# Altium PCB CarteTxCapteurDistance.PCBDOC
Units mm, origin at the board's own origin, x right, y up, seen from the top; angles counter-clockwise.
Board outline 299.72 x 199.9 mm, 2 copper layers (Top Layer, Bottom Layer); 45 components, 33 nets, 132 pads, 69 vias.
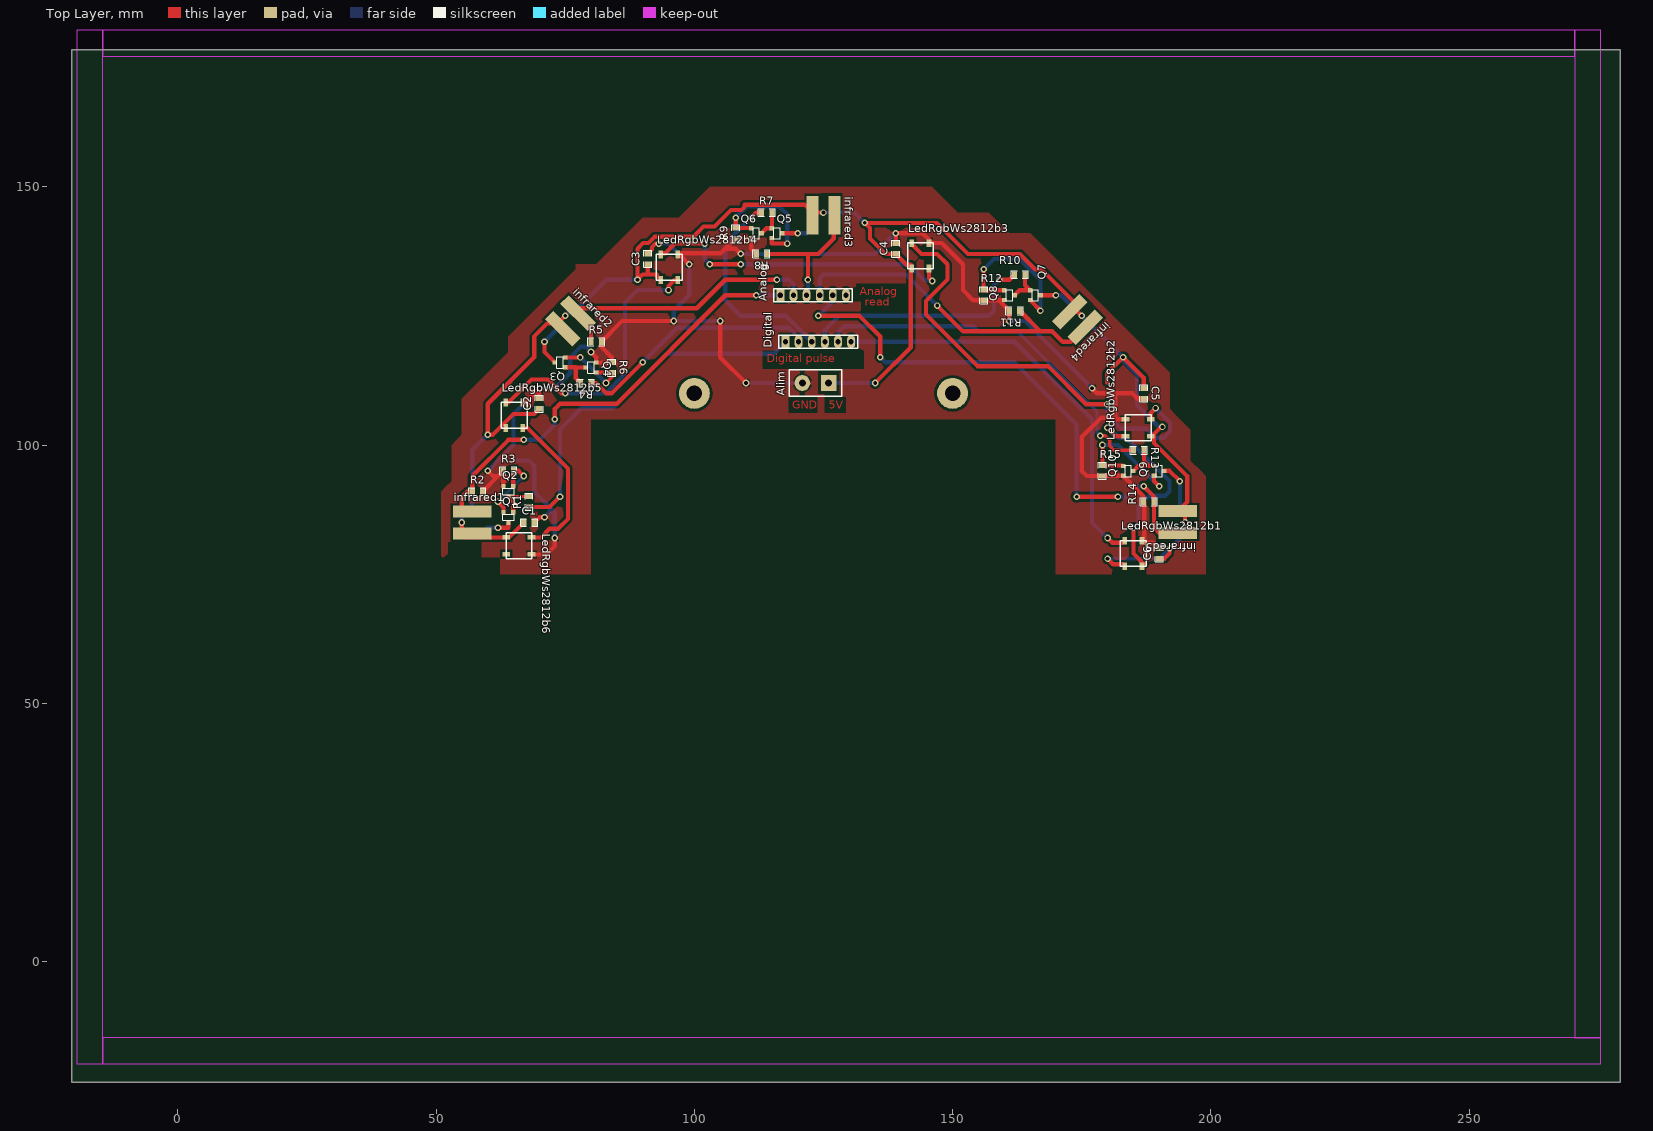
[diagram p0: Top Layer view]
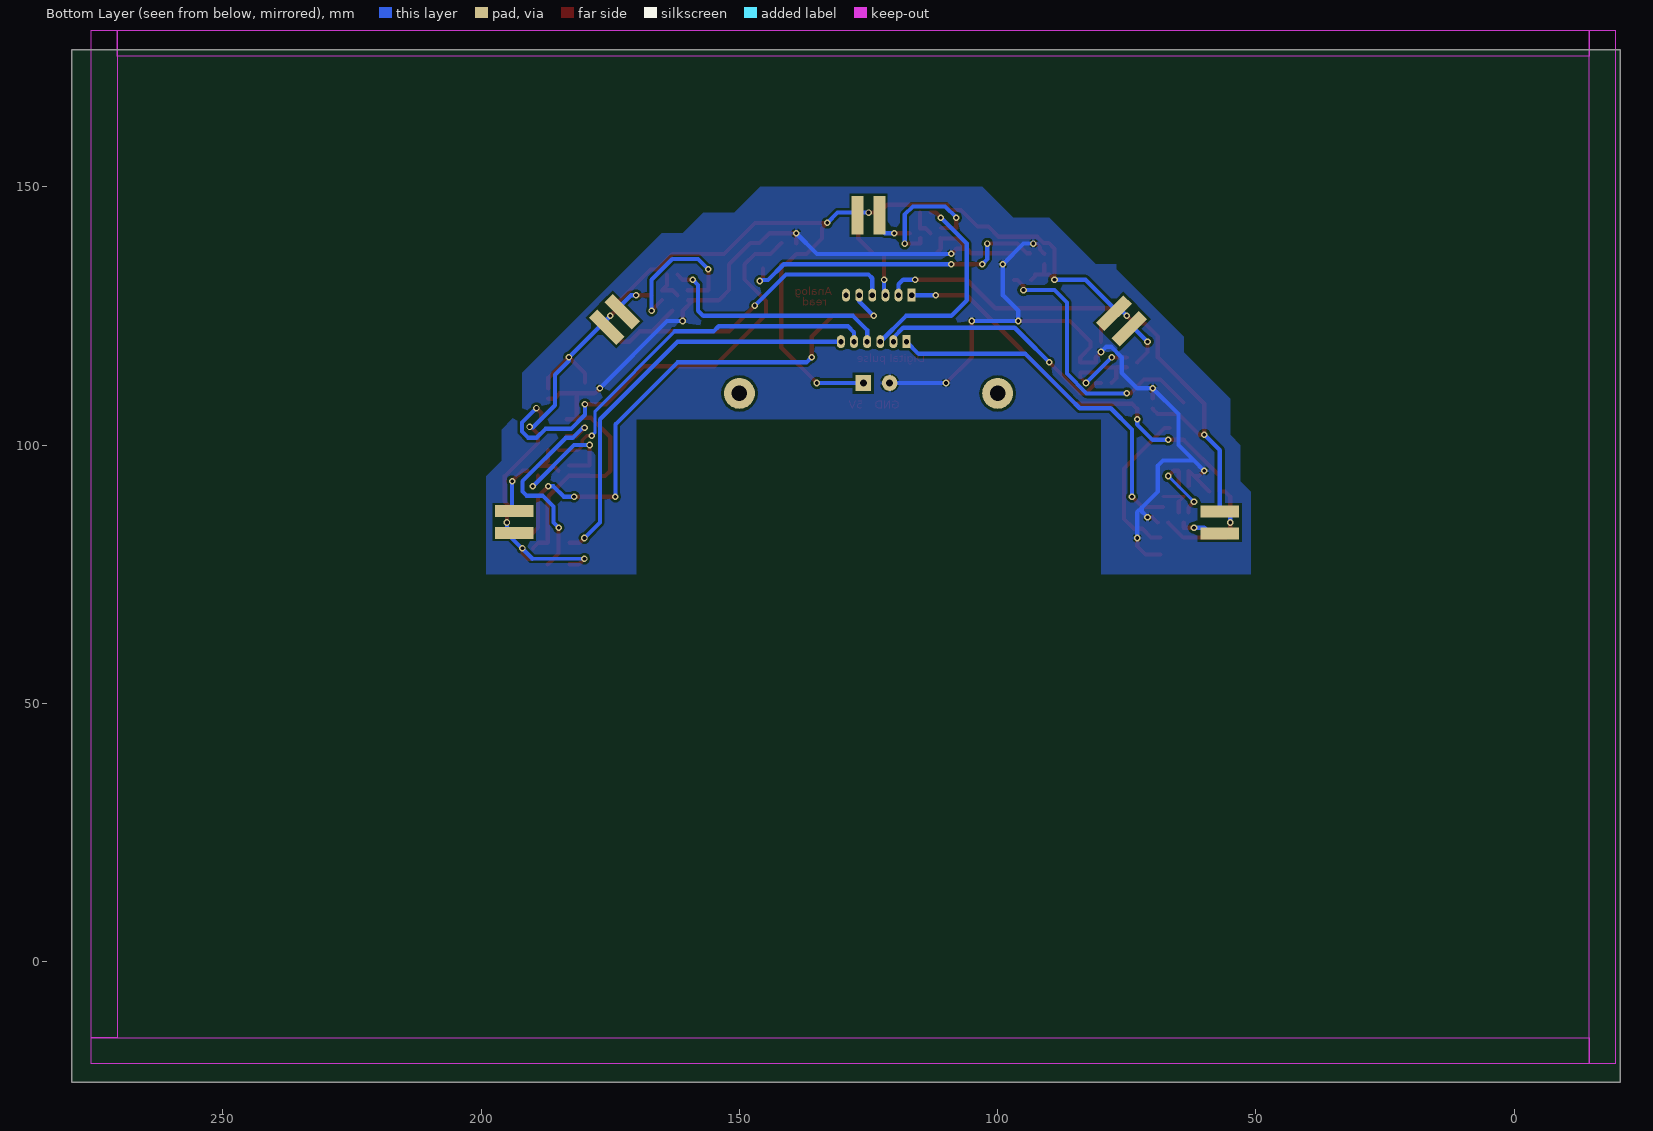
[diagram p1: Bottom Layer view, seen from below]

## Layer stack, top to bottom
Top Solder: solder mask 0.0102, Solder Resist, Dk 3.5
Top Layer: signal copper 0.0356
Dielectric1: dielectric 0.32, FR-4, Dk 4.8
Bottom Layer: signal copper 0.0356
Bottom Solder: solder mask 0.0102, Solder Resist, Dk 3.5

## Board outline
-20.497,-23.403 279.223,-23.403 279.223,176.495 -20.497,176.495

## Design rules (kind name [scope] priority, off if disabled: settings)
Clearance Clearance_bottom_polygon [OnLayer('Bottom Layer') Or OnLayer('Multi-Layer') vs OnLayer('Bottom Layer')  And  InPoly] p1: gap=0.508
Clearance Clearance_top_polygon [OnLayer('Top Layer')  Or OnLayer('Multi-Layer') vs OnLayer('Top Layer') And InPoly] p2: gap=0.508
Clearance Clearance_bottom [OnLayer('Bottom Layer') Or OnLayer('Multi-Layer') vs OnLayer('Bottom Layer')  And Not InPoly] p3: gap=0.203
Clearance Clearance_top [OnLayer('Top Layer')  Or OnLayer('Multi-Layer') vs OnLayer('Top Layer') And Not InPoly] p4: gap=0.203
Clearance Clearance_pad_to_pad [OnLayer('Multi-Layer') vs OnLayer('Multi-Layer')] p5: gap=0.254
ComponentClearance ComponentClearance_bottom [OnLayer('Bottom Overlay') vs OnLayer('Bottom Overlay')] p1: gap=0 collisioncheckmode=3 verticalgap=0.254 showdistances=FALSE
ComponentClearance ComponentClearance_top [OnLayer('Top Overlay') vs OnLayer('Top Overlay')] p2: gap=0 collisioncheckmode=3 verticalgap=0.254 showdistances=FALSE
FabricationTestPointUsage TestPointUsage [All] p1: valid=0 allowmultiple=FALSE
FabricationTestpoint Testpoint [All] p1: side=3 testpointundercomponent=TRUE minsize=1.016 maxsize=2.54 preferedsize=1.524 minholesize=0 maxholesize=1.016 preferedholesize=0.813 testpointgrid=0.025 allowsidetop=TRUE allowsidebottom=TRUE usegrid=TRUE gridtolerance=0
HoleSize [All] p1: absolutevalues=TRUE maxlimit=25.4 minlimit=0.406 maxpercent=80.000 minpercent=20.000
MinimumAnnularRing [PadXSize_AllLayers = PadYSize_AllLayers] p1: minimumring=0.203
PermittedLayers [All] p1: toplayerpermitted=TRUE bottomlayerpermitted=TRUE
PolygonConnect [All] p1: connectstyle=Relief reliefconductorwidth=0.61 reliefentries=4 polygonreliefangle="90 Angle" airgapwidth=0.254
RoutingVias [All] p1: holewidth=0.406 width=0.813 viastyle="Through Hole" minholewidth=0.4 minwidth=0.8 maxholewidth=0.6 maxwidth=10
SMDToPlane [All] p1: distance=0
SolderMaskExpansion [All] p1: expansion=0.102
ViasUnderSMD [All] p1: allowed=FALSE
Width Width_botom_top [OnLayer('Bottom Layer') or OnLayer('Top Layer')] p1: maxlimit=254 minlimit=0.254 preferedwidth=0.813 minimp=50.000000 maximp=50.000000 favimp=50.000000
25 further rules are at their usual default settings.

## Components (designator, comment, footprint, x,y, rotation, side; value= is the part's Value field where it differs from the comment)
Alim "comment" POWER2 126,112 r180 top
Analog "Analog" HEADER6 123,129 r90 top
C1 "CAP" 0805 67,85 r0 top
C2 "CAP" 0805 70,107 r90 top
C3 "CAP" 0805 91,135 r90 top
C4 "CAP" 0805 139,137 r90 top
C5 "CAP" 0805 187,111 r270 top
C6 "CAP" 0805 190,78 r90 top
Digital "Digital" HEADER6 124,120 r90 top
infrared1 "infrared" Infrared 57,85 r90 top
infrared2 "infrared" Infrared 76,124 r45 top
infrared3 "infrared" Infrared 125,144.5 r0 top
infrared4 "infrared" Infrared 174.2,124.3 r315 top
infrared5 "infrared" Infrared 193.6,85.1 r270 top
LedRgbWs2812b1 "LedRgbWs2812b" LedRgbWs2812b 185,79 r90 top
LedRgbWs2812b2 "LedRgbWs2812b" LedRgbWs2812b 185.91,103.33 r180 top
LedRgbWs2812b3 "LedRgbWs2812b" LedRgbWs2812b 143.77,136.63 r90 top
LedRgbWs2812b4 "LedRgbWs2812b" LedRgbWs2812b 95.17,134.41 r90 top
LedRgbWs2812b5 "LedRgbWs2812b" LedRgbWs2812b 65.13,105.76 r90 top
LedRgbWs2812b6 "LedRgbWs2812b" LedRgbWs2812b 66.05,80.48 r0 top
Q1 "Q1" BC817-40 64,86 r0 top
Q2 "Q2" BC817-40 64,91 r0 top
Q3 "Q1" BC817-40 74,116 r270 top
Q4 "Q2" BC817-40 80,115 r270 top
Q5 "Q1" BC817-40 116,141 r90 top
Q6 "Q2" BC817-40 112,141 r90 top
Q7 "Q1" BC817-40 166,129 r90 top
Q8 "Q2" BC817-40 161,129 r90 top
Q9 "Q1" BC817-40 190,95 r90 top
Q10 "Q2" BC817-40 184,95 r90 top
R1 "RES" 0805 68,88 r90 top
R2 "RES" 0805 57,91 r0 top
R3 "RES" 0805 63,95 r0 top
R4 "RES" 0805 80,112 r180 top
R5 "RES" 0805 80,120 r0 top
R6 "RES" 0805 84,116 r270 top
R7 "RES" 0805 113,145 r0 top
R8 "RES" 0805 114,137 r180 top
R9 "RES" 0805 108,140 r90 top
R10 "RES" 0805 162,133 r0 top
R11 "RES" 0805 163,126 r180 top
R12 "RES" 0805 156,128 r90 top
R13 "RES" 0805 185,99 r0 top
R14 "RES" 0805 189,89 r180 top
R15 "RES" 0805 179,94 r90 top

## Footprints (in the part's own frame and the unit in brackets; to place one, negate y for a bottom-side part, rotate by r counter-clockwise, add the part's x,y. Pads: shape width x height; smd on the part's side, far side on the other; paste and mask are expansions set on the pad)
0805 [mil]
  rect 40x50 smd: 1(0,0) 2(80,0)
  silkscreen extent -25,-30 105,30
BC817-40 [mm]
  rect 0.8x0.9 smd: 1(0.95,1) 2(-0.95,1) 3(0,-1)
  silkscreen extent -1.1,-0.6 1.1,0.6
HEADER6 [mm]
  rect 2.524x1.524 hole 1: 1(0,6.35)
  oval 2.524x1.524 hole 1: 2(0,3.81) 3(0,1.27) 4(0,-1.27) 5(0,-3.81) 6(0,-6.35)
  silkscreen extent -1.27,-7.62 1.27,7.62
Infrared [mm]
  rect 2.3x7.5 smd far side: gndEmitter(-2.1,0) VCC(2.1,0)
  rect 2.3x7.5 smd: gndReceiver(2.1,0) VCC(-2.1,0)
LedRgbWs2812b [mm]
  rect 1.5x0.9 smd: din(2.45,1.65) dout(-2.45,-1.65) GND(2.45,-1.65) VCC(-2.45,1.65)
  silkscreen extent -2.5,-2.5 2.5,2.5
POWER2 [mil]
  rect 120x120 hole 52: 1(0,0)
  round 120 hole 52: 2(200,0)
  silkscreen extent -100,-100 300,100

## Part data
Alim: library part POWER2, "connecteur alim 2 pôles"
Analog Digital: library part HEADER6
C1 C2 C3 C4 C5 C6: "capacité non polarisée"
infrared1 infrared2 infrared3 infrared4 infrared5: library part RPR-359F
Q1 Q2 Q3 Q4 Q5 Q6 Q7 Q8 Q9 Q10: library part Transistors
R1 R2 R3 R4 R5 R6 R7 R8 R9 R10 R11 R12 R13 R14 R15: "resistance"

## Free pads (board coordinates)
  round 6 hole 3: ""(100,110) ""(150,110)

## Via types
v1: diameter 1.27, hole 0.711, Top Layer to Bottom Layer, 69 vias

## Nets (pads, with @x,y where several pads share a name; then routed paths per layer and width w, separated by ;. In a path a pad name is that pad's centre, name@x,y a point inside that pad or via, vN(x,y) a via of type N, cw(c..) or ccw(c..) an arc to the next point about the centre after c; other vN are vias at no path point)
A9: Analog.1 infrared1.gndReceiver R2.1 | length 84.2
  Top Layer w0.82: infrared1.gndReceiver@55,87.1 55,90 56,91 R2.1 57,94 64,101 v1(67,101) ; v1(73,105) 73,107 74,108 85,108 106,129 v1(112,129)
  Bottom Layer w0.82: v1(67,101) 70,101 73,104 v1(73,105) ; v1(112,129) Analog.1
A10: Analog.2 infrared2.gndReceiver R5.1 | length 55.4
  Top Layer w0.635: infrared2.gndReceiver@76.485,126.485 infrared2.gndReceiver@80,122.97
  Top Layer w0.82: infrared2.gndReceiver@76.485,126.485 100.485,126.485 106,132 v1(116,132) ; R5.1 infrared2.gndReceiver@80,122.97
  Bottom Layer w0.82: v1(116,132) 118.3,132 119.19,131.11 Analog.2
A11: Analog.3 infrared3.gndReceiver R8.1 | length 27.4
  Top Layer w0.635: infrared3.gndReceiver@127,144.9 infrared3.gndReceiver@127.1,145
  Top Layer w0.82: R8.1 122,137 ; v1(122,132) 122,137 ; infrared3.gndReceiver@127,144.9 127,140 124,137 122,137
  Bottom Layer w0.635: Analog.3 Analog.3@122,129.27
  Bottom Layer w0.82: Analog.3@122,129.27 v1(122,132)
A12: Analog.4 infrared4.gndReceiver R11.1 | length 69.3
  Top Layer w0.635: infrared4.gndReceiver@174.97,122 infrared4.gndReceiver@176.485,123.515
  Top Layer w0.82: v1(147,127) 152,122 167,122 ; R11.1 167,122 ; infrared4.gndReceiver 172.87,120 171.3,120 169.3,122 167,122
  Bottom Layer w0.82: Analog.4 124.27,132.27 125,133 141,133 v1(147,127)
A13: Analog.5 infrared5.gndReceiver R14.1 | length 109.3
  Top Layer w0.635: infrared5.gndReceiver@190.1,82.9 infrared5.gndReceiver@195,82.9
  Top Layer w0.82: v1(124,125) 132,125 136,121 v1(136,117) ; v1(174,90) v1(182,90) ; v1(187,92) 189,90 R14.1 189,84 infrared5.gndReceiver@190.1,82.9
  Bottom Layer w0.82: v1(124,125) 126.81,127.81 Analog.5 ; v1(136,117) 137,116 162,116 174,104 v1(174,90) ; v1(182,90) 184,90 186,92 v1(187,92)
D3: Digital.6 LedRgbWs2812b1.din | length 80.4
  Top Layer w0.82: v1(180,82) 180.9,81.1 182.9,81.1
  Bottom Layer w0.82: Digital.6 162,120 177,105 177,85 v1(180,82)
D35: Digital.2 R4.1 | length 47.9
  Top Layer w0.82: R4.1 81,112 83,110 84,110 v1(90,116)
  Bottom Layer w0.635: Digital.2 Digital.2@120.19,120.81
  Bottom Layer w0.8: v1(90,116) 95.15,121.15
  Bottom Layer w0.82: 95.15,121.15 96.7,122.7 118.3,122.7 Digital.2@120.19,120.81
D37: Digital.1 R1.1 | length 70.5
  Top Layer w0.82: R1.1 72,88 v1(74,90)
  Bottom Layer w0.82: 86,109 94.65,117.65 115.3,117.65 Digital.1
  Bottom Layer w0.86: v1(74,90) 74,103 78.1,107.1 84.1,107.1 86,109
D39: Digital.3 R7.1 | length 40.5
  Top Layer w0.82: v1(111,144) 112,145 R7.1
  Bottom Layer w0.82: v1(111,144) 106,139 106,128 109,125 117.73,125 Digital.3
D41: Digital.4 R10.1 | length 46.4
  Top Layer w0.82: v1(159,132) 161,132 R10.1
  Bottom Layer w0.82: Digital.4 125.27,122.27 128,125 157,125 158,126 158,131 v1(159,132)
D43: Digital.5 R13.1 | length 72.5
  Top Layer w0.635: v1(178.58,101.8) 179.55,101.8 180.4,100.95 180.4,99.83 181.23,99 R13.1
  Bottom Layer w0.635: 162.5,122 177.931,106.569 177.931,102.449 v1(178.58,101.8)
  Bottom Layer w0.82: Digital.5 127.81,121.81 129,123 154,123 155,122 162.5,122
GND: Alim.2 C1.2 C2.2 C3.2 C4.2 C5.2 C6.2 LedRgbWs2812b1.GND LedRgbWs2812b2.GND LedRgbWs2812b3.GND LedRgbWs2812b4.GND LedRgbWs2812b5.GND LedRgbWs2812b6.GND Q2.2 Q4.2 Q6.2 Q8.2 Q10.2 R2.2 R3.1 R5.2 R6.1 R8.2 R9.1 R11.2 R12.1 R14.2 R15.1 | length 342.8
  Top Layer w0.635: R3.1@63,94.968 R3.1 ; v1@80,117.95 v1(80,118) ; R6.1@83.95,115.95 R6.1 ; v1@92.5,139 v1(93.1,139) ; LedRgbWs2812b4.GND@97.1,136.9 LedRgbWs2812b4.GND@97.1,137.1 ; R8.2 R8.2@111.968,137.032 ; R15.1 R15.1@179.05,94.05 ; R14.2 R14.2@187.1,88.868 ; C6.2@189.968,80.032 C6.2
  Top Layer w0.82: R2.2 62.016,93.984 ; v1(60,95) 61.016,93.984 62.016,93.984 ; Q2.2@63,92.05 63,94.968 62.016,93.984 ; LedRgbWs2812b5.GND@67.1,108.1 v1(70,111) C2.2 ; LedRgbWs2812b6.GND 71.38,78.83 73,80.45 v1(73,82) ; C1.2 70.032,86 v1(71,86) ; v1(80,118) 81,117 Q4.2 R6.1@83.95,115.95 ; R6.1 84,117 82.032,118.968 R5.2 86.032,124 v1(96,124) ; C3.2 91.8,137.832 91.8,138.3 v1@92.5,139 ; LedRgbWs2812b4.GND@97.1,136.9 v1(99,135) ; LedRgbWs2812b4.GND@97.1,137.1 105.1,137.1 106,138 ; v1(105,124) 105,117 v1(110,112) ; v1(109,137) 108,138 106,138 ; Q6.2@110.95,140 R9.1 106,138 ; Q6.2 111,138 R8.2@111.968,137.032 ; C4.2 v1(139,141) 144.2,141 146.1,139.1 147.9,139.1 152,135 152,130 154,128 R12.1 159,128 ; Q8.2@159.95,128 159,128 ; v1@160.968,124.032 R11.2 159,127.968 159,128 ; v1(177,111) 178,110 181.48,110 ; R15.1 176,94 175,95 175,101.53 178.73,105.26 181.48,105.26 ; R15.1@179.05,94.05 Q10.2 186.968,90.082 R14.2 ; LedRgbWs2812b2.GND 181.76,104.98 181.48,105.26 ; C5.2 185.852,108.968 184.82,110 181.48,110 ; R14.2@187.1,88.868 187.1,81.1 188.9,81.1 C6.2@189.968,80.032 ; 181.48,105.26 181.48,110
  Bottom Layer w0.635: 72,87 72,88
  Bottom Layer w0.82: v1(60,95) 62,97 ; v1(71,86) 72,87 ; v1(73,82) 73,87 72,88 69,91 69,96 68,97 62,97 ; v1(80,118) 79,119 78,119 76,117 76,114 73,111 v1(70,111) 65,106 65,100 62,97 ; v1(93.1,139) 95,139 v1(99,135) 99,129 96,126 v1(96,124) v1(105,124) ; v1(109,137) 135,137 v1(139,141) ; v1(110,112) Alim.2 ; v1(161,124) 164,124 v1(177,111)
Netinfrared1_gndEmitter: infrared1.gndEmitter Q1.3 | length 10.6
  Top Layer w0.82: v1(62,84) 64,84 Q1.3
  Bottom Layer w0.635: infrared1.gndEmitter@55.1,83 55,82.9 infrared1.gndEmitter@58.9,82.9
  Bottom Layer w0.82: infrared1.gndEmitter@58.9,82.9 60,84 v1(62,84)
Netinfrared2_gndEmitter: infrared2.gndEmitter Q3.3 | length 9.4
  Top Layer w0.82: v1(71,120) 71,118 Q3.3
  Bottom Layer w0.635: infrared2.gndEmitter@73.515,122.515 infrared2.gndEmitter@73.515,123.515
  Bottom Layer w0.82: v1(71,120) infrared2.gndEmitter@73.515,122.515
Netinfrared3_gndEmitter: infrared3.gndEmitter Q5.3 | length 9.4
  Top Layer w0.82: Q5.3 v1(120,141)
  Bottom Layer w0.635: infrared3.gndEmitter@122.9,142.1 122.9,145 infrared3.gndEmitter@123,144.9
  Bottom Layer w0.82: v1(120,141) 121.8,141 infrared3.gndEmitter@122.9,142.1
Netinfrared4_gndEmitter: infrared4.gndEmitter Q7.3 | length 7.6
  Top Layer w0.82: Q7.3 v1(170,129)
  Bottom Layer w0.82: v1(170,129) 171,129 infrared4.gndEmitter@173.515,126.485
Netinfrared5_gndEmitter: infrared5.gndEmitter Q9.3 | length 9.7
  Top Layer w0.82: Q9.3 192,95 v1(194,93)
  Bottom Layer w0.82: infrared5.gndEmitter@194,87.1 v1(194,93)
NetLedRgbWs2812b1_dout: LedRgbWs2812b1.dout LedRgbWs2812b2.din | length 42.2
  Top Layer w0.82: v1(179.97,103.32) 181.61,101.68 LedRgbWs2812b2.din ; v1(185,84) 185,79 187.1,76.9
  Bottom Layer w0.82: v1(179.97,103.32) 180.35,103.32 182.28,101.39 183.61,101.39 192,93 192,91 191.2,90.2 188.1,90.2 186,88.1 186,85 v1(185,84)
NetLedRgbWs2812b2_dout: LedRgbWs2812b2.dout LedRgbWs2812b3.din | length 87.3
  Top Layer w0.82: LedRgbWs2812b3.din@141.9,139.1 144,137 147,137 149,135 149,132.06 144.84,127.9 144.84,125.25 154.83,115.26 168.45,115.26 175.81,107.9 v1(179.9,107.9) ; LedRgbWs2812b2.dout 188.36,106.22 v1(189.29,107.15)
  Bottom Layer w0.82: v1(179.9,107.9) 179.9,105.85 182.62,103.13 187.51,103.13 189.22,101.42 190.9,101.42 192.09,102.61 192.09,104.35 v1(189.29,107.15)
NetLedRgbWs2812b3_dout: LedRgbWs2812b3.dout LedRgbWs2812b4.din | length 60.1
  Top Layer w0.82: LedRgbWs2812b4.din@93.76,137.1 94.3,137.1 96.2,139 v1(102,139) ; v1(103,135) v1(109,135) ; LedRgbWs2812b3.dout 145.42,132.36 v1(146.03,131.75)
  Bottom Layer w0.82: v1(102,139) 102,136 v1(103,135) ; v1(109,135) 141.42,135 144.47,131.95 v1@145.72,131.95
NetLedRgbWs2812b4_dout: LedRgbWs2812b4.dout LedRgbWs2812b5.din | length 53.4
  Top Layer w0.8: 64.021,108.21 68.471,112.66 71.66,112.66 74.32,110 v1(75,110)
  Top Layer w0.82: v1(95,130) 95,130.8 96.16,131.96 LedRgbWs2812b4.dout
  Bottom Layer w0.8: v1(75,110) 82.79,110 86.6,113.81 86.6,127.6 89,130 v1(95,130)
NetLedRgbWs2812b5_dout: LedRgbWs2812b5.dout LedRgbWs2812b6.din | length 30.3
  Top Layer w0.8: LedRgbWs2812b5.dout 67.69,103.31 75.53,95.47 75.53,85.71 73.61,83.79 71.99,83.79 70.33,82.13 LedRgbWs2812b6.din
NetQ1_1: Q1.1 Q2.3 R1.2 | length 7.4
  Top Layer w0.635: Q2.3 64.95,89.05 ; Q2.3@64.032,90.032 R1.2
  Top Layer w0.82: Q1.1 64.95,89.05
NetQ1_2: Q1.2 Q2.1 R3.2 | length 14.8
  Top Layer w0.82: v1(62,89) 63.05,87.95 Q1.2 ; Q2.1 R3.2@64.95,94.918 ; R3.2 66,95 v1(67,94)
  Bottom Layer w0.635: v1(62,89) v1(67,94)
NetQ3_1: Q3.1 Q4.3 R4.2 | length 7.4
  Top Layer w0.635: R4.2 R4.2@77.968,112.032
  Top Layer w0.82: Q3.1 77.05,115.05 77.05,112.95 R4.2@77.968,112.032 ; 77.1,115 Q4.3
NetQ3_2: Q3.2 Q4.1 R6.2 | length 15.5
  Top Layer w0.635: v1(82.9,112) 84,113.1 R6.2 R6.2@83.918,114.05
  Top Layer w0.82: Q3.2 v1(77.95,116.95) ; Q4.1 R6.2@83.918,114.05
  Bottom Layer w0.635: v1(82.9,112) v1@83,112
  Bottom Layer w0.82: v1(77.95,116.95) v1(82.9,112)
NetQ5_1: Q5.1 Q6.3 R7.2 | length 5.4
  Top Layer w0.82: Q6.3 113.95,141.95 Q5.1 ; Q5.1@115.032,141.982 R7.2
NetQ5_2: Q5.2 Q6.1 R9.2 | length 26.1
  Top Layer w0.82: v1(108,144) R9.2 Q6.1@110.918,142.032 ; Q5.2 115,139 v1(118,139)
  Bottom Layer w0.8: v1(108,144) 110.2,146.2 116.4,146.2 118,144.6 v1(118,139)
NetQ7_1: Q7.1 Q8.3 R10.2 | length 6.8
  Top Layer w0.82: Q8.3 162.95,129.95 Q7.1 164.032,130.918 R10.2
NetQ7_2: Q7.2 Q8.1 R12.2 | length 30.2
  Top Layer w0.635: 166.05,126.95 166.05,127
  Top Layer w0.82: R12.2 v1(156,134) ; R12.2@156.082,129.95 Q8.1 ; Q7.2 166.05,127 ; 166.05,126.95 v1(167,126)
  Bottom Layer w0.82: v1(156,134) 158,136 163,136 167,132 v1(167,126)
NetQ9_1: Q9.1 Q10.3 R13.2 | length 7.8
  Top Layer w0.82: Q10.3 185.95,95.95 188,95.95 ; R13.2 187.032,96.918 188,95.95 ; Q9.1 188,95.95
NetQ9_2: Q9.2 Q10.1 R15.2 | length 24.7
  Top Layer w0.82: v1(179,100) R15.2 Q10.1@182.918,96.032 ; Q9.2 189,93 v1(190,92)
  Bottom Layer w0.82: v1(179,100) 182,100 v1(190,92)
VCC: Alim.1 C1.1 C2.1 C3.1 C4.1 C5.1 C6.1 infrared1.VCC infrared2.VCC infrared3.VCC infrared4.VCC infrared5.VCC LedRgbWs2812b1.VCC LedRgbWs2812b2.VCC LedRgbWs2812b3.VCC LedRgbWs2812b4.VCC LedRgbWs2812b5.VCC LedRgbWs2812b6.VCC | length 344.6
  Top Layer w0.635: infrared1.VCC@55,82.9 infrared1.VCC@55.8,82.1 ; infrared4.VCC@173.515,126.485 infrared4.VCC@173.515,127.685
  Top Layer w0.82: infrared1.VCC@55,82.9 v1(55,85) ; infrared1.VCC@55.8,82.1 64.1,82.1 C1.1 ; C2.1 69,106 65,106 61,102 v1(60,102) 60,108 69,117 69,121 71.515,123.515 73.515,123.515 v1(75,125) ; C3.1 91,133 ; LedRgbWs2812b4.VCC 92.8,132.68 92.8,133 91,133 ; v1(125,145) 122.9,145 121.4,146.5 109.7,146.5 109.7,146.1 109.1,145.5 107.1,145.5 103.9,142.3 101.8,142.3 99.8,140.3 92.3,140.3 91.1,139.1 90.1,139.1 89,138 v1(89,132) 90,133 91,133 ; v1(135,112) 141.9,118.9 141.9,134.9 141.1,134.9 C4.1 137,137 134,140 134,142 v1(133,143) 147,143 153,137 163,137 166,134 167.2,134 infrared4.VCC@173.515,127.685 ; infrared4.VCC@173.515,126.485 v1(175,125) ; 179.9,112.1 179.9,113.9 v1(183,117) 187,113 C5.1 ; v1(180,78) 181.1,76.9 182.9,76.9 ; C6.1 191,78 192,79 v1(192,80) ; v1@190.36,103.47 189,102.11 189,100.4 195.4,94 195.4,89 infrared5.VCC@193.6,87.2 ; v1(195,85) infrared5.VCC@195,87.1
  Bottom Layer w0.635: infrared2.VCC@76.485,126.485 infrared2.VCC@77.485,126.485 ; v1(180,78) 190.1,78
  Bottom Layer w0.82: v1(55,85) infrared1.VCC@55,87.1 ; infrared1.VCC@57,87.1 57,99 v1(60,102) ; v1(75,125) infrared2.VCC@76.485,126.485 ; infrared2.VCC@77.485,126.485 83,132 v1(89,132) ; v1(125,145) 131,145 v1(133,143) ; Alim.1 v1(135,112) ; v1(175,125) v1(183,117) 183,116.3 185.7,113.6 185.7,107.7 189.95,103.45 v1@190.41,103.45 ; 190.1,78 195,82.9 v1(195,85)
  other v1: 190.62,103.5
pads on no net: Analog.6 LedRgbWs2812b6.dout

## Polygon pours and split planes (outlines as drawn)
GND on Top Layer "Bottom Layer-No Net" (solid, remove dead copper, pour order 4): 51,75 80,75 80,105 170,105 170,75 199,75 199,94 198,95 196,97 196,101 196,103 193,106 192,107 192,112 192,114 184,122 165,141 162,141 161,141 158,144 157,145 151,145 148,148 146,150 105,150 103,150 98,145 97,144 92,144 90,144 84,138 81,135 77,135 77,134 69,126 64,121 64,120 64,118 57,111 55,109 55,102 54,101 53,100 53,97 53,93 52,92 51,91 51,87 51,75
GND on Bottom Layer "Bottom Layer-No Net" (solid, remove dead copper, pour order 6): 51,75 80,75 80,105 170,105 170,75 199,75 199,94 196,97 196,103 192,107 192,114 165,141 161,141 157,145 151,145 146,150 103,150 97,144 90,144 81,135 77,135 77,134 64,121 64,118 55,109 55,102 53,100 53,93 51,91 51,75

## Keep-outs
Keep-Out Layer:
  rectangle: -14.537,175.257 270.463,180.257
  rectangle: 270.463,-14.743 275.463,180.257
  rectangle: -14.537,-19.743 275.463,-14.743
  rectangle: -19.537,-19.743 -14.537,180.257

## Other copper
Top Layer:
  text "Analog" at 132,129 h1.52
  text "read" at 133,127 h1.52
  text "Digital pulse" at 114,116 h1.52
  text "GND" at 119,107 h1.52
  text "5V" at 126,107 h1.52

## Silkscreen, mask and mechanical layers (free items; w line width, h text height)
Mechanical 1:
  lines w0.254: 51,75 cw(c125,75) 125,149 cw(c125,75) 199,75 170,75 170,105 80,105 80,75 51,75